# Altium PCB CANSwitch_V2.PcbDoc
Units mm, origin at the board's own origin, x right, y up, seen from the top; angles counter-clockwise.
Board outline 60 x 35 mm, 2 copper layers (Top Layer, Bottom Layer); 63 components, 44 nets, 208 pads, 92 vias.
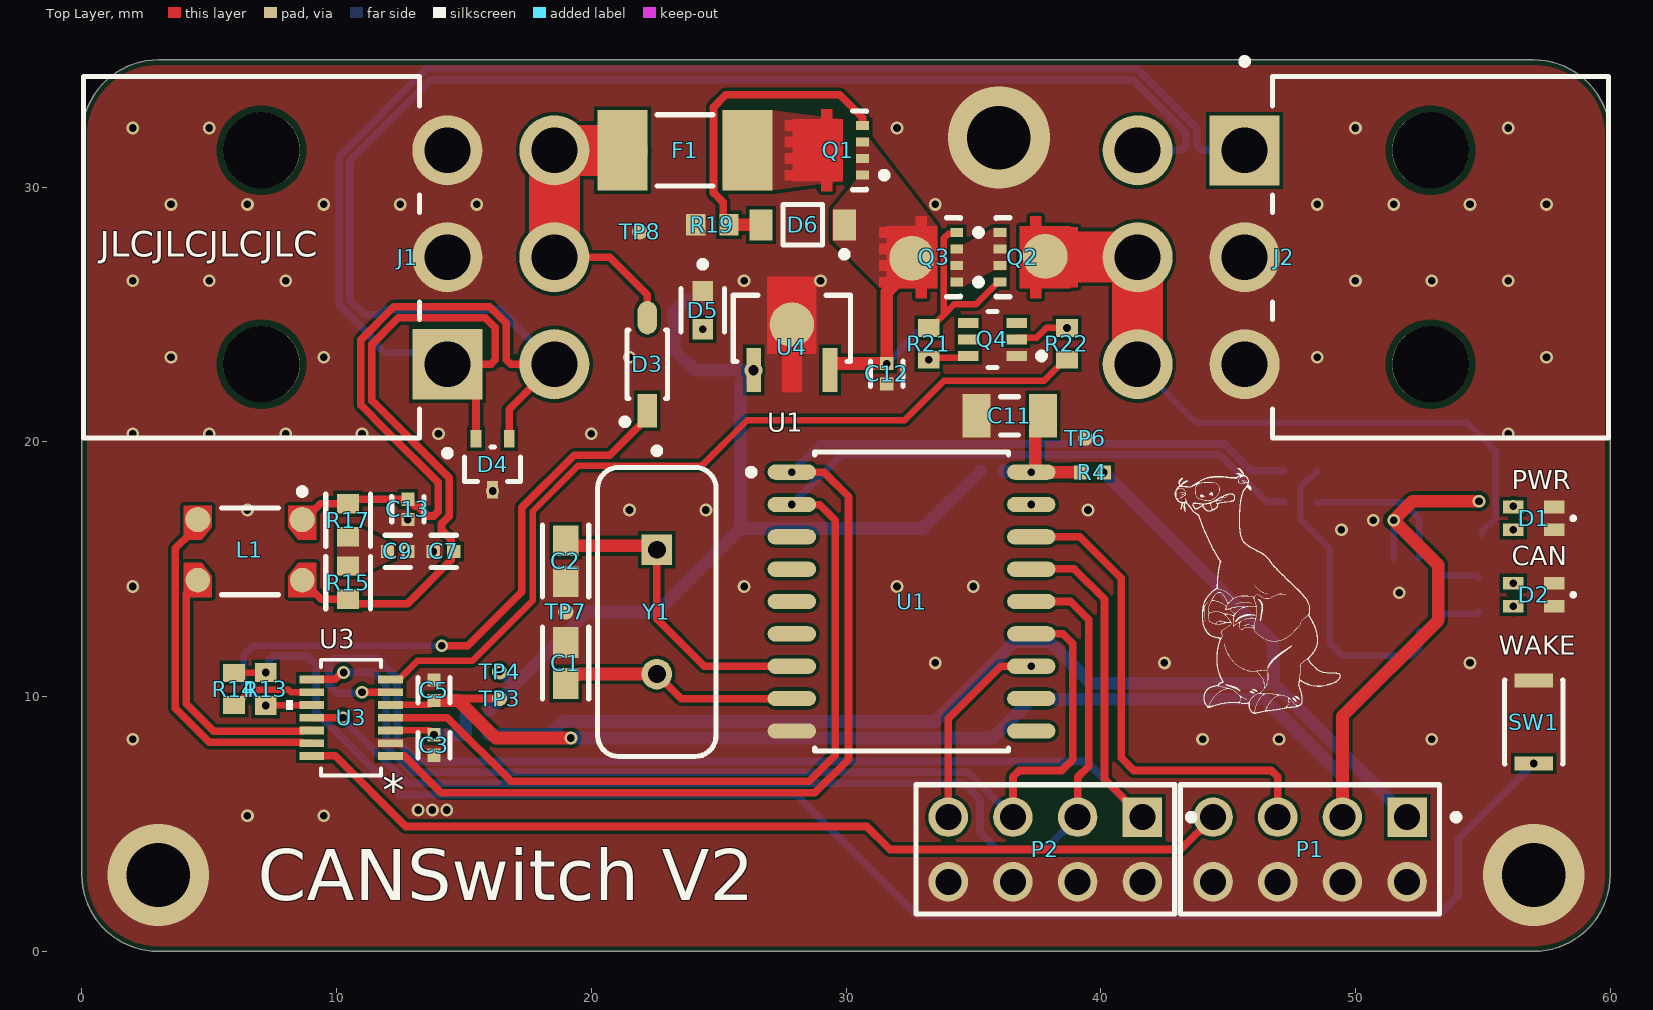
[diagram p0: Top Layer view]
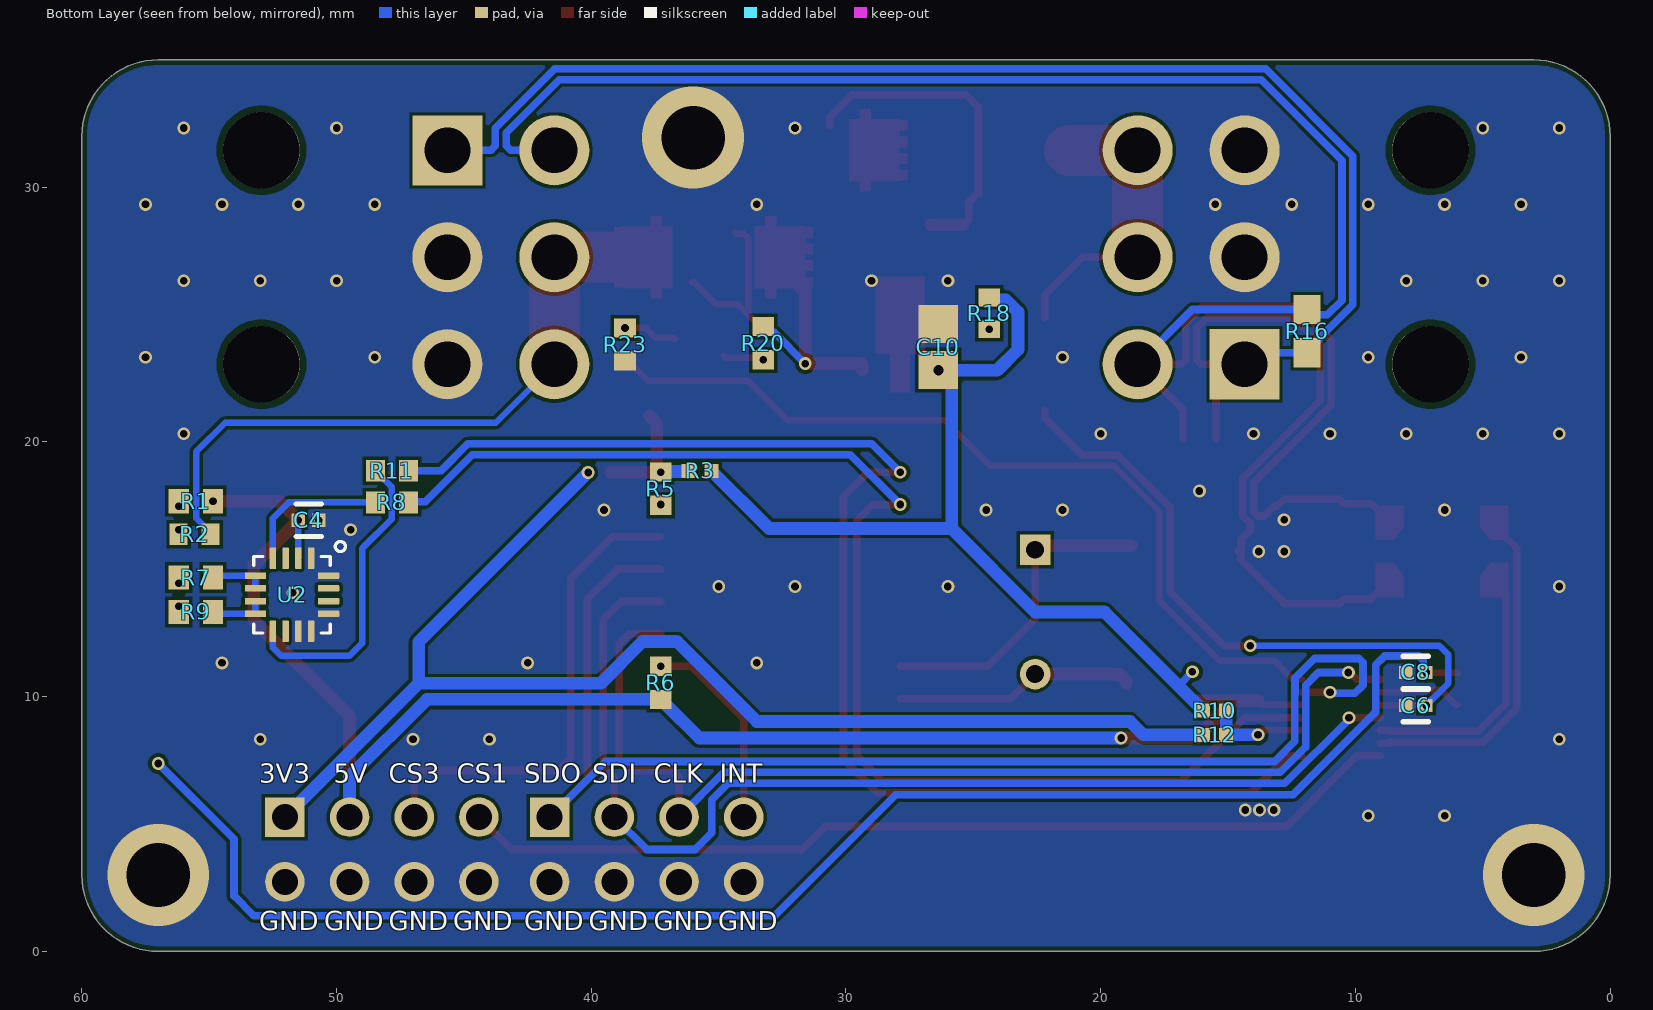
[diagram p1: Bottom Layer view, seen from below]
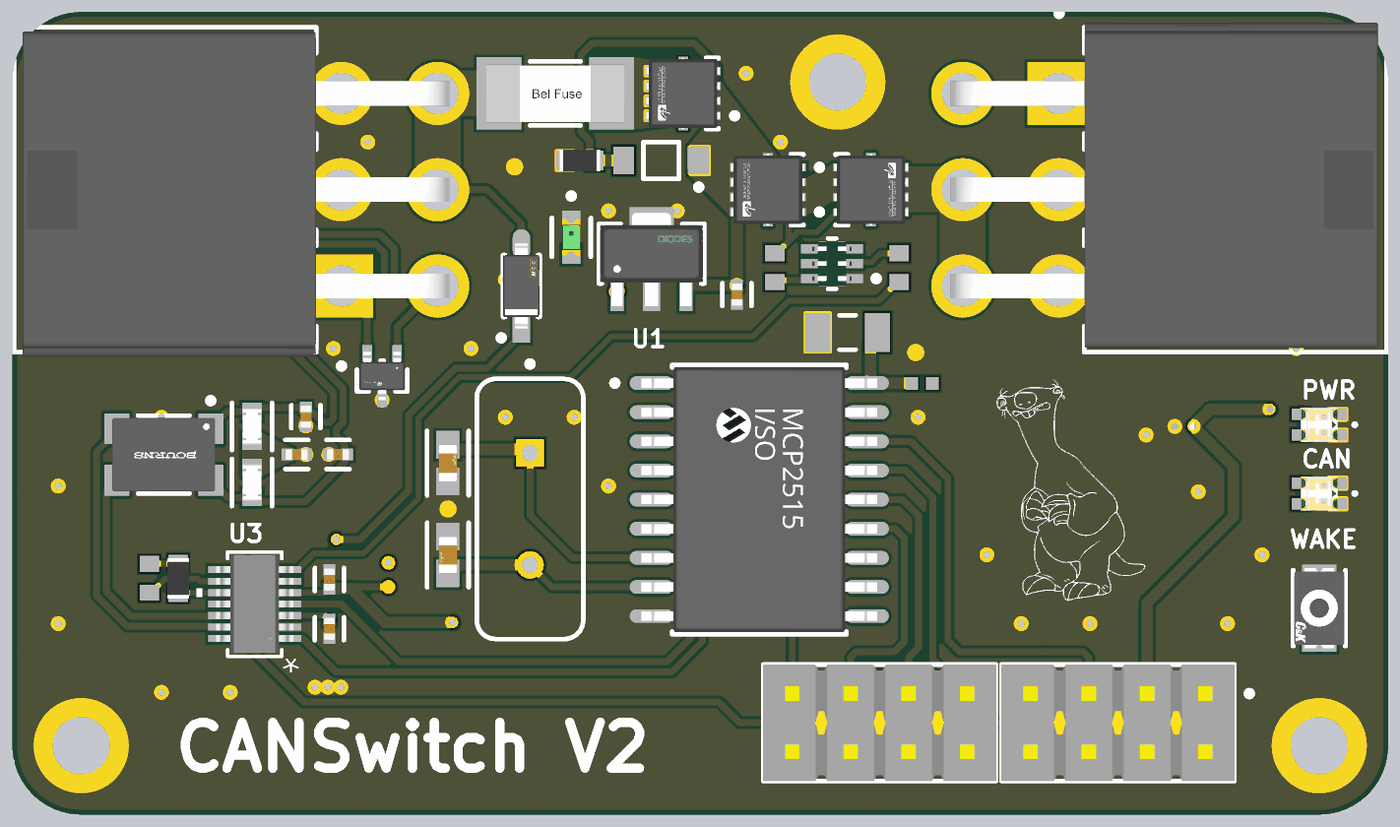
[diagram p2: 3D render of the assembled board from above, using the file's embedded part models]
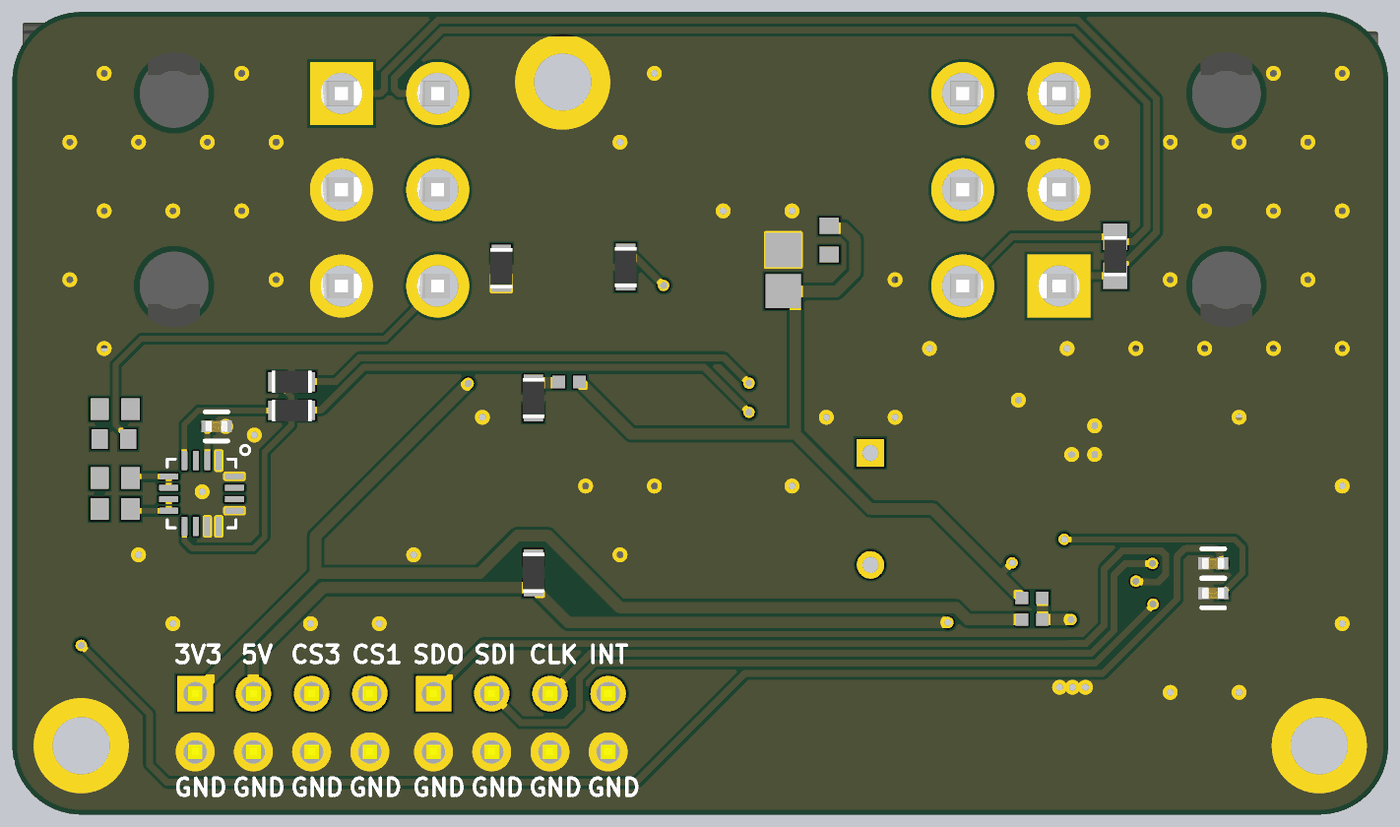
[diagram p3: 3D render of the assembled board from below, using the file's embedded part models]

## Layer stack, top to bottom
Top Solder: solder mask 0.0102, Solder Resist, Dk 3.5
Top Layer: signal copper 0.0356
Dielectric 1: dielectric 0.32, FR-4, Dk 4.8
Bottom Layer: signal copper 0.0356
Bottom Solder: solder mask 0.0102, Solder Resist, Dk 3.5

## Board outline
0,3 ccw(c3,3) 3,0 57,0 ccw(c57,3) 60,3 60,32 ccw(c57,32) 57,35 3,35 ccw(c3,32) 0,32

## Design rules (kind name [scope] priority, off if disabled: settings)
BoardOutlineClearance [All] p1: gap=0.2 ignorepadtopadclearanceinfootprint=FALSE
Clearance [All] p1: gap=0.127 ignorepadtopadclearanceinfootprint=FALSE except(0.25: Arc-Hole Track-Hole SMDPad-Hole THPad-Hole Via-Hole Fill-Hole Poly-Hole Region-Hole Text-Hole)
ComponentClearance [All] p1: gap=0.127 collisioncheckmode=3 verticalgap=0.127 showdistances=TRUE
DiffPairsRouting [All] p1: maxlimit=0.254 minlimit=0.127 mostfreqgap=0.127 toplayer_minwidth=0.127 toplayer_maxwidth=25.4 toplayer_prefwidth=0.127 bottomlayer_minwidth=0.127 bottomlayer_maxwidth=25.4 bottomlayer_prefwidth=0.127 maxuncoupledlength=12.7
Height [All] p1: minheight=0 maxheight=1816.048 prefheight=12.7
HoleSize [All] p1: absolutevalues=TRUE maxlimit=6.3 minlimit=0.3 maxpercent=80.000 minpercent=20.000
HoleToHoleClearance [All] p1: gap=0.25 allowstackedmicrovias=FALSE
MinimumAnnularRing [All] p1: minimumring=0.076
MinimumSolderMaskSliver [All] p1: minsoldermaskwidth=0
PlaneClearance [All] p1: clearance=0.127
PlaneConnect PlaneConnectPowerPads [InPadClass('PowerPads')] p1: planeconnectstyle=Direct reliefexpansion=0.508 reliefentries=4 reliefconductorwidth=0.254 reliefairgap=0.254
PlaneConnect [All] p2: pad.planeconnectstyle=Relief pad.reliefexpansion=0.3 pad.reliefentries=4 pad.reliefconductorwidth=0.127 pad.reliefairgap=0.127 via.planeconnectstyle=Direct via.reliefexpansion=0.3 via.reliefentries=4 via.reliefconductorwidth=0.127 via.reliefairgap=0.127
PolygonConnect PolygonConnectPowerPads [All vs (InPadClass('PowerPads'))] p1: connectstyle=Direct reliefconductorwidth=0.254 reliefentries=4 polygonreliefangle="90 Angle" airgapwidth=0.254
PolygonConnect [All] p2: connectstyle=Direct reliefconductorwidth=0.127 reliefentries=4 polygonreliefangle="90 Angle" airgapwidth=0.127
RoutingVias [All] p1: holewidth=0.3 width=0.6 viastyle="Through Hole" minholewidth=0.3 minwidth=0.6 maxholewidth=0.6 maxwidth=6.6
SilkToSilkClearance [All] p1: silktosilkclearance=0
SilkToSolderMaskClearance [IsPad] p1: minsilkscreentomaskgap=0.127 clearancetoexposedcopper=TRUE
SolderMaskExpansion [All] p1: expansion=0.075 istentingtop=FALSE
Width [All] p1: maxlimit=25.4 minlimit=0.127 preferedwidth=0.127 minimp=50.000000 maximp=50.000000 favimp=50.000000
20 further rules are at their usual default settings.

## Classes and differential pairs
net class 120DIFF: CAN_N CAN_P PRE_CAN_N PRE_CAN_P
component class PWR_MGMT: C10 C12 D6 F1 Q1 Q2 Q3 Q4 R19 R20 R21 R22 R23 U4
component class CANSwitch_V2: D1 J1 J2 P1 P2 R1 R2 TP3 TP4 TP6 TP7 TP8
component class CAN_0: C1 C2 C3 C4 C5 C6 C7 C8 C9 C11 C13 D2 D3 D4 D5 L1 R3 R4 R5 R6 R7 R8 R9 R10 R11 R12 R13 R14 R15 R16 R17 R18 SW1 U1 U2 U3 Y1
differential pair PRE_CAN: +PRE_CAN_P -PRE_CAN_N
differential pair CAN: +CAN_P -CAN_N

## Components (designator, comment, footprint, x,y, rotation, side; value= is the part's Value field where it differs from the comment)
C1 "GRM188R60J106ME47D" FP-GRM188-0_1-e0_2_0_55-IPC_A 18.994,11.319 r270 top
C2 "GRM188R60J106ME47D" FP-GRM188-0_1-e0_2_0_55-IPC_A 18.994,15.323 r90 top
C3 "C0402C104K8PACTU" FP-C0402-BB-MFG 13.825,8.1 r90 top value="0.10 μF"
C4 "C0402C104K8PACTU" FP-C0402-BB-MFG 51.1,16.925 r0 bottom value="0.10 μF"
C5 "C0402C104K8PACTU" FP-C0402-BB-MFG 13.825,10.25 r270 top value="0.10 μF"
C6 "C0402C104K8PACTU" FP-C0402-BB-MFG 7.625,9.65 r180 bottom value="0.10 μF"
C7 "C0402C104K8PACTU" FP-C0402-BB-MFG 14.2,15.7 r180 top value="0.10 μF"
C8 "C0402C104K8PACTU" FP-C0402-BB-MFG 7.625,10.95 r180 bottom value="0.10 μF"
C9 "C0402C104K8PACTU" FP-C0402-BB-MFG 12.4,15.7 r0 top value="0.10 μF"
C10 "C0805C225K9PACTU" CAPC2013X145X50ML20T25 26.375,23.725 r270 bottom
C11 "1206GC102KAT1A" AVX-1206-2_L 36.425,21.025 r0 top
C12 "C0402C104K8PACTU" FP-C0402-BB-MFG 31.6,22.675 r90 top value="0.10 μF"
C13 "C0402C104K8PACTU" FP-C0402-BB-MFG 12.8,17.35 r90 top value="0.10 μF"
D1 "150066RG54050" WL-SBCD_0606 57,17 r270 top
D2 "150066RG54050" WL-SBCD_0606 57,14 r270 top
D3 "1N4148W-TP" FP-SOD-123-IPC_A 22.2,23.05 r90 top
D4 "ESDCAN02-2BWY" FP-SOT323-3L-MFG 16.125,19.125 r270 top value=3pF
D5 "LTST-C190GKT" FP-LTST-C190GKT-MFG 24.375,25.175 r270 top
D6 "MMSZ5242BT1G" ONSC-SOD-123-2-425-04_V 28.3,28.525 r180 top
F1 "0679L9150-01" FP-0679L-MFG 23.68,31.45 r0 top value=0.0038Ω
J1 "455580003" FP-455580003-MFG 6.85,27.25 r90 top
J2 "455580003" FP-455580003-MFG 53.15,27.25 r270 top
L1 "SRF4532-510Y" FP-SRF4532-MFG 6.6,15.7 r180 top
P1 "TSW-104-08-L-D" SMTC-TSW-104-08-L-D_V 48.22,4 r180 top
P2 "TSW-104-08-L-D" SMTC-TSW-104-08-L-D_V 37.825,4 r180 top
Q1 "SISH615ADN-T1-GE3" SISH615ADN-T1-GE3-Footprint-1#1 29.25,31.413 r90 top
Q2 "SISH615ADN-T1-GE3" SISH615ADN-T1-GE3-Footprint-1#2 37.45,27.288 r270 top
Q3 "SISH615ADN-T1-GE3" SISH615ADN-T1-GE3-Footprint-1#2 32.95,27.213 r90 top
Q4 "SSM6N7002KFU,LF" FP-SSOP6-P-0_65A-MFG 35.75,24.025 r180 top
R1 "ERJ3EKF56R0V" RESC1608X55X30NL15T15 55.525,17.675 r180 bottom
R2 "ERJ-3EKF1001V" RESC1608X55X30LL15T15 55.575,16.375 r0 bottom
R3 "0402 JUMPER 0 OHM" RESC1005X40X25NL05T05 35.725,18.86 r0 bottom
R4 "0402 JUMPER 0 OHM" RESC1005X40X25NL05T05 39.675,18.8 r180 top
R5 "ERJ3EKF1002V" RESC1609X55X30LL15T15 37.275,18.164 r270 bottom
R6 "ERJ3EKF1002V" RESC1609X55X30LL15T15 37.275,10.544 r90 bottom
R7 "ERJ3EKF56R0V" RESC1608X55X30NL15T15 55.525,14.675 r180 bottom
R8 "ERJ3EKF1002V" RESC1609X55X30LL15T15 47.825,17.625 r0 bottom
R9 "ERJ3EKF56R0V" RESC1608X55X30NL15T15 55.525,13.325 r180 bottom
R10 "0402 JUMPER 0 OHM" RESC1005X40X25NL05T05 15.525,9.45 r180 bottom
R11 "ERJ3EKF1002V" RESC1609X55X30LL15T15 47.825,18.875 r180 bottom
R12 "0402 JUMPER 0 OHM" RESC1005X40X25NL05T05 15.525,8.5 r180 bottom
R13 "ERJ3EKF1002V" RESC1609X55X30LL15T15 7.225,10.3 r90 top
R14 "ERJ-3EKF1001V" RESC1608X55X30LL15T15 5.975,10.3 r90 top
R15 "ERJ-3EKF60R4V" FP-ERJ3EK-IPC_C 10.45,14.476 r90 top
R16 "ERJ-3EKF1200V" RESC1609X55X30ML15T15 11.9,24.35 r90 bottom
R17 "ERJ-3EKF60R4V" FP-ERJ3EK-IPC_C 10.45,16.925 r90 top
R18 "ERJ-3EKF1001V" RESC1608X55X30LL15T15 24.375,25.05 r90 bottom
R19 "ERJ3EKF1002V" RESC1609X55X30LL15T15 24.75,28.525 r180 top
R20 "ERJ3EKF1002V" RESC1609X55X30LL15T15 33.25,23.875 r90 bottom
R21 "ERJ-3EKF1001V" RESC1608X55X30LL15T15 33.25,23.85 r270 top
R22 "ERJ-3EKF1001V" RESC1608X55X30LL15T15 38.675,23.85 r270 top
R23 "ERJ3EKF1002V" RESC1609X55X30LL15T15 38.675,23.825 r270 bottom
SW1 "KXT331LHS" FP-KXT331LHS-MFG 57,9 r270 top
TP3 "TPAD6R" TP06R 16.4,9.925 r90 top
TP4 "TPAD6R" TP06R 16.4,10.975 r90 top
TP6 "TPAD6R" TP06R 39.4,20.15 r90 top
TP7 "TPAD6R" TP06R 19,13.325 r90 top
TP8 "TPAD6R" TP06R 21.9,28.25 r90 top
U1 "MCP2515-I/SO" FP-C04-051-MFG 32.575,13.734 r0 top
U2 "LM2902Q4T" LM2902Q4T-Footprint-1 51.75,14 r270 bottom
U3 "TCAN1146DYYRQ1" TCAN1146DYYRQ1-Footprint-1 10.568,9.175 r180 top
U4 "AP7381-50Y-13" FP-SOT89-MFG 27.875,24.46 r0 top
Y1 "FOXSLF/160-20" FOX-FOXSLF160-20 22.575,13.325 r270 top

## Footprints (in the part's own frame and the unit in brackets; to place one, negate y for a bottom-side part, rotate by r counter-clockwise, add the part's x,y. Pads: shape width x height; smd on the part's side, far side on the other; paste and mask are expansions set on the pad)
AVX-1206-2_L [mm] "SMD, 2-Leads, Body 3.4x1.8mm, IPC High Density"
  rect 1.1x1.7 smd: 1(-1.3,0) 2(1.3,0)
  silkscreen extent -0.35,-0.75 0.35,0.75, body extent -1.7,-0.9 1.7,0.9, height 1.52
CAPC2013X145X50ML20T25 [mm] "Chip Capacitor, 2-Leads, Body 2.00x1.25mm, IPC Low Density"
  rect 1.5x1.55 smd: 1(-0.9,0) 2(0.9,0)
  body extent -1.1,-0.72 1.1,0.72, height 1.45
FOX-FOXSLF160-20 [mm] "THD, 2-Leads, Body 11.35x4.65mm"
  rect 1.2x1.2 hole 0.7: 1(-2.44,0)
  round 1.2 hole 0.7: 2(2.44,0)
  silkscreen extent -6.45,-2.32 5.68,2.32, body extent -5.67,-2.32 5.68,2.33, height 3.6
FP-0679L-MFG [mm]
  rect 1.96x3.15 smd paste+0 mask+0: 1(-2.455,0) 2(2.455,0)
  silkscreen extent -1.1,-1.4 1.1,1.4, body extent -3.53,-1.68 3.53,1.68, height 0.25
FP-455580003-MFG [mm]
  rect 2.75x2.75 hole 1.8 paste-2539.97 mask+0: 1(-4.2,-7.5)
  round 2.75 hole 1.8 paste-2539.97 mask+0: 2(0,-7.5) 3(4.2,-7.5) 4(-4.2,-11.7) 5(0,-11.7) 6(4.2,-11.7)
  round 3 hole 3 unplated paste-2539.97 mask+0: ""(-4.2,-0.2) ""(4.2,-0.2)
  silkscreen extent -7.81,-7.63 7.09,6.78, body extent -7.19,-13.18 7.19,6.88, height 0.25
FP-C04-051-MFG [mm]
  rrect100% 1.9x0.6 smd paste+0 mask+0: 1(-4.7,5.08) 2(-4.7,3.81) 3(-4.7,2.54) 4(-4.7,1.27) 5(-4.7,0) 6(-4.7,-1.27) 7(-4.7,-2.54) 8(-4.7,-3.81) 9(-4.7,-5.08) 10(4.7,-5.08) 11(4.7,-3.81) 12(4.7,-2.54) 13(4.7,-1.27) 14(4.7,0) 15(4.7,1.27) 16(4.7,2.54) 17(4.7,3.81) 18(4.7,5.08)
  silkscreen extent -6.42,-5.87 3.8,5.87, body extent -5.75,-6.12 5.75,6.12, height 0.25
FP-C0402-BB-MFG [mm]
  rect 0.52x0.52 smd paste+0 mask+0: 1(-0.4,0) 2(0.4,0)
  silkscreen extent -0.5,-0.64 0.5,0.64, body extent -0.8,-0.4 0.8,0.4, height 0.25
FP-ERJ3EK-IPC_C [mm]
  rect 0.757x0.862 smd paste+0 mask+0: 1(-0.651,0) 2(0.651,0)
  silkscreen extent -1.03,-0.87 1.03,0.87, body extent -1.13,-0.58 1.13,0.58, height 0.25
FP-GRM188-0_1-e0_2_0_55-IPC_A [mm]
  rect 1.208x1.012 smd paste+0 mask+0: 1(-0.802,0) 2(0.802,0)
  silkscreen extent -1.41,-0.91 1.41,0.91, body extent -1.91,-1.01 1.91,1.01, height 0.25
FP-KXT331LHS-MFG [mm]
  rect 0.55x1.5 smd paste+0 mask+0: 1(-1.625,0) 2(1.625,0)
  silkscreen extent -1.65,-1.15 1.65,1.15, body extent -2,-1.25 2,1.25, height 0.25
FP-LTST-C190GKT-MFG [mm]
  rect 0.8x0.8 smd paste+0 mask+0: 1(-0.75,0) 2(0.75,0)
  silkscreen extent -1.92,-0.85 0.85,0.85, body extent -1.25,-0.55 1.25,0.55, height 0.25
FP-SOD-123-IPC_A [mm]
  rect 1.308x0.762 smd paste+0 mask+0: 1(-1.825,0)
  rrect100% 1.308x0.762 smd paste+0 mask+0: 2(1.825,0)
  silkscreen extent -2.39,-0.8 1.35,1.01, body extent -2.98,-1.3 2.98,1.3, height 0.25
FP-SOT89-MFG [mm]
  rect 0.58x1.73 smd paste+0 mask+0: 1(-1.5,-1.635) 3(1.5,-1.635)
  round 1.74 smd paste+0 mask+0: 2(0,0.146)
  Top Layer region: -0.38,-2.5 0.38,-2.5 0.38,-1 0.967,-1 0.967,2.03 -0.967,2.03 -0.967,-1 -0.38,-1 -0.38,-2.5
  silkscreen extent -2.3,-1.3 2.3,1.3, body extent -2.4,-2.6 2.4,2.13, height 0.25
FP-SOT323-3L-MFG [mm]
  rect 0.7x0.42 smd paste+0 mask+0: 1(-1,0.65) 2(-1,-0.65) 3(1,0)
  silkscreen extent -0.67,-1.1 0.67,1.1, body extent -1.45,-1.2 1.45,1.2, height 0.25
FP-SRF4532-MFG [mm]
  round 0.99 smd paste+0 mask+0: 1(-2.05,-1.25) 2(2.05,-1.25)
  round 0.97 smd paste+0 mask+0: 3(2.05,1.125) 4(-2.05,1.125)
  Top Layer region: -2.6,0.45 -2.6,1.8 -1.5,1.8 -1.5,0.95 -1.9,0.45
  Top Layer region: 1.5,1.8 2.6,1.8 2.6,0.45 1.9,0.45 1.5,0.95
  Top Layer region: 1.5,-1.8 1.5,-0.95 1.9,-0.45 2.6,-0.45 2.6,-1.8
  Top Layer region: -2.6,-1.8 -2.6,-0.45 -1.9,-0.45 -1.5,-0.95 -1.5,-1.8
  silkscreen extent -2.17,-2.47 1.12,1.7, body extent -2.7,-1.9 2.7,1.9, height 0.25
FP-SSOP6-P-0_65A-MFG [mm]
  rect 0.8x0.4 smd paste+0 mask+0: 1(-0.95,0.65) 2(-0.95,0) 3(-0.95,-0.65) 4(0.95,-0.65) 5(0.95,0) 6(0.95,0.65)
  silkscreen extent -2.05,-1.1 0.18,1.1, body extent -1.45,-1.2 1.45,1.2, height 0.25
LM2902Q4T-Footprint-1 [mm]
  rrect25% 0.84x0.26 smd: 1(-1.435,0.75) 2(-1.435,0.25) 3(-1.435,-0.25) 4(-1.435,-0.75) 9(1.435,-0.75) 10(1.435,-0.25) 11(1.435,0.25) 12(1.435,0.75)
  rrect25% 0.26x0.84 smd: 5(-0.75,-1.435) 6(-0.25,-1.435) 7(0.25,-1.435) 8(0.75,-1.435) 13(0.75,1.435) 14(0.25,1.435) 15(-0.25,1.435) 16(-0.75,1.435)
  silkscreen extent -2.09,-1.5 1.5,2.1
ONSC-SOD-123-2-425-04_V [mm] "SOD, 2-Leads, Body 2.69x1.6mm"
  rect 0.91x1.22 smd: 1(-1.635,0) 2(1.635,0)
  silkscreen extent -1.76,-0.8 0.78,1.28, body extent -1.35,-0.8 1.35,0.8, height 1.35
RESC1005X40X25NL05T05 [mm] "Chip Resistor, 2-Leads, Body 1.00x0.50mm, IPC Medium Density"
  rect 0.55x0.55 smd: 1(-0.45,0) 2(0.45,0)
  body extent -0.53,-0.27 0.53,0.28, height 0.4
RESC1608X55X30LL15T15 [mm] "Chip Resistor, 2-Leads, Body 1.60x0.80mm, IPC High Density"
  rect 0.7x0.85 smd: 1(-0.625,0) 2(0.625,0)
  body extent -0.87,-0.48 0.87,0.48, height 0.55
RESC1608X55X30NL15T15 [mm] "Chip Resistor, 2-Leads, Body 1.60x0.80mm, IPC Medium Density"
  rect 0.8x0.95 smd: 1(-0.675,0) 2(0.675,0)
  body extent -0.87,-0.48 0.87,0.48, height 0.55
RESC1609X55X30LL15T15 [mm] "Chip Resistor, 2-Leads, Body 1.75x0.95mm, IPC High Density"
  rect 0.75x0.85 smd: 1(-0.65,0) 2(0.65,0)
  body extent -0.87,-0.48 0.87,0.48, height 0.55
RESC1609X55X30ML15T15 [mm] "Chip Resistor, 2-Leads, Body 1.75x0.95mm, IPC Low Density"
  rect 1.15x1.05 smd: 1(-0.85,0) 2(0.85,0)
  body extent -0.87,-0.48 0.87,0.48, height 0.55
SISH615ADN-T1-GE3-Footprint-1#1 [mm]
  rect 0.35x0.5 smd paste+0 mask+0: 1(-0.937,-1.4) 2(-0.288,-1.4) 3(0.363,-1.4) 4(1.012,-1.4)
  round 0.025 smd: 5-6-7-8(0.038,0.51)
  Top Layer region: -1.187,-0.63 -1.187,-0.215 -1.568,-0.215 -1.568,0.215 -1.187,0.215 -1.187,1.35 -1.137,1.35 -1.137,1.65 -0.737,1.65 -0.737,1.35 -0.487,1.35 -0.487,1.65 -0.088,1.65 -0.088,1.35 0.163,1.35 0.163,1.65 0.563,1.65 0.563,1.35 0.813,1.35 0.813,1.65 1.212,1.65 1.212,1.35 1.262,1.35 1.262,0.215 1.643,0.215 1.643,-0.215 1.262,-0.215 1.262,-0.63
  silkscreen extent -1.51,-2.38 1.59,-1.01, body extent -1.67,-1.75 1.74,1.75, height 0.25
SISH615ADN-T1-GE3-Footprint-1#2 [mm]
  rect 0.35x0.5 smd paste+0 mask+0: 1(-0.937,-1.4) 2(-0.288,-1.4) 3(0.363,-1.4) 4(1.012,-1.4)
  round 1.769 smd paste+0 mask+0: 5-6-7-8(0,0.367)
  Top Layer region: -1.187,-0.63 -1.187,-0.215 -1.568,-0.215 -1.568,0.215 -1.187,0.215 -1.187,1.35 -1.137,1.35 -1.137,1.65 -0.737,1.65 -0.737,1.35 -0.487,1.35 -0.487,1.65 -0.088,1.65 -0.088,1.35 0.163,1.35 0.163,1.65 0.563,1.65 0.563,1.35 0.813,1.35 0.813,1.65 1.212,1.65 1.212,1.35 1.262,1.35 1.262,0.215 1.643,0.215 1.643,-0.215 1.262,-0.215 1.262,-0.63
  silkscreen extent -1.51,-2.37 1.59,-1.01, body extent -1.67,-1.75 1.74,1.75, height 0.25
SMTC-TSW-104-08-L-D_V [mm] "CONN, 8-Leads, Body 10.16x5.08mm, Pitch 2.54mm"
  rect 1.55x1.55 hole 1.02: 1(-3.81,-1.27)
  round 1.55 hole 1.02: 2(-3.81,1.27) 3(-1.27,-1.27) 4(-1.27,1.27) 5(1.27,-1.27) 6(1.27,1.27) 7(3.81,-1.27) 8(3.81,1.27)
  silkscreen extent -5.86,-2.54 5.08,2.54, body extent -5.08,-2.54 5.08,2.54, height 8.38
TCAN1146DYYRQ1-Footprint-1 [mil]
  rect 38.5x12 smd paste+0 mask+0: 1(-60.75,59.07) 2(-60.75,39.38) 3(-60.75,19.69) 4(-60.75,0) 5(-60.75,-19.69) 6(-60.75,-39.38) 7(-60.75,-59.07) 8(60.75,-59.07) 9(60.75,-39.38) 10(60.75,-19.69) 11(60.75,0) 12(60.75,19.69) 13(60.75,39.38) 14(60.75,59.07)
  silkscreen extent -47,-90 100,90, body extent -66,-84 66,84, height 43
TP06R [mm] "Testpoint, round, d=0.6mm"
  round 0.6 smd paste-1: 1(0,0)
WL-SBCD_0606 [mm] "SMT Bi-color Chip LED Diffuesed, body 1.5x1.6mm"
  rect 0.5x0.8 smd: 1(-0.45,0.8) 2(-0.45,-0.8) 3(0.45,-0.8) 4(0.45,0.8)
  silkscreen extent -0.07,1.48 0.07,1.63, body extent -0.75,-0.8 0.75,0.8, height 0.55

## Part data
C1 C2: library part CMP-2006-02792-2, "Chip Multilayer Ceramic Capacitors for General Purpose, 0603, 10uF, X5R, 15%, 20%, 6.3V", Capacitance=10uF, Case Code (Imperial)=0603, Case Code (Metric)=1608, Dielectric=X5R, Max Operating Temperature=85°C, Min Operating Temperature=-55°C, Package Quantity=4000, Tolerance=20%, Voltage=6.3V, Case/Package=0603, Depth=0.8mm, Height=0.8mm, Lead Free="Lead Free", Length=1.6mm, Material=Ceramic, Mount="Surface Mount", Packaging="Tape and Reel", Radiation Hardening=No, REACH SVHC="No SVHC", Termination=SMD/SMT, Thickness=0.035inch, Voltage Rating=6.3V, Voltage Rating (DC)=6.3V, Width=0.031inch
C3 C4 C5 C6 C7 C8 C9 C12 C13: library part CMP-2008-02046-2, "CAP CER 0.1UF 10V X5R 0402", Capacitance="0.10 μF", Manufacturer=Kemet, Package=C0402-BB, Temperature="-55°C to +125°C", Temperature Characteristic=X5R, Temperature Coefficient=15%, Temperature Range High=+125°C, Temperature Range Low=-55°C, Tolerance=0.1, Voltage Rating="10 V", Automotive=No, Category=Cap, ComponentLink2Description=Datasheet, ComponentLink2URL=https://content.kemet.com/datasheets/KEM_C1002_X7R_SMD.pdf, Device Class L1="Passive Components", Device Class L2=Capacitors, Device Class L3="Ceramic Capacitors", Digikey Description="CAP CER 0.1UF 10V X5R 0402", Height=0.55mm, Ipc Land Pattern Name=CAPC10050X50, Lead Free=Yes, Manufacturer Part Number=C0402C104K8PACTU, Material=Ceramic, Mouser Description="Capacitor 100 nF 10 VDC 0402", Octopart=https://octopart.com/c0402c104k8pactu-kemet-140039, RoHS=TRUE
C10: library part CMP-1036-04819-2, Manufacturer=Kemet, Part Number=C0805C225K9PACTU
C11: library part CMP-2000-05468-1, "Chip Capacitor, 1 nF, +/- 10%, -55 to 125 degC, 1206 (3216 Metric), RoHS, Tape and Reel", Capacitance=0.001uF, Case Size/Dimension=1206, Dielectric=X7R, Manufacturer=AVX, Package Description="2-Pin SMD, Body 3.4 x 1.8 mm", Rated Voltage=2000V, Tolerance=10%, Tolerance (%)=±10%, Datasheet URL=https://datasheet.ciiva.com/11787/0900766b80ed4c37-11787781.pdf, Datasheet Version=11/2010, Manufacturer URL=http://www.avx.com/, Mounting Technology=SurfaceMount, Package Reference=1206, PartNumber=1206GC102KAT1A, Voltage Rating DC=2000V
D1 D2: library part CMP-004-00034-2, "Led, Red/Grn, 180Mcd/230Mcd, 624Nm/525Nm Rohs Compliant: Yes"
D3: library part CMP-2000-04993-2, "DIODE GEN PURP 100V 150MA SOD123", Average Rectified Current=150mA, Capacitance=4pF, Forward Voltage=1V, Max Forward Surge Current (Ifsm)=1A, Max Operating Temperature=150°C, Max Repetitive Reverse Voltage (Vrrm)=100V, Max Reverse Leakage Current=5uA, Max Surge Current=2A, Min Operating Temperature=-65°C, Package Quantity=3000, Power Dissipation=400mW, Current Rating=150mA, Element Configuration=Single, Forward Current=150mA, Height=1.2mm, Lead Free="Lead Free", Length=2.85mm, Max Reverse Voltage (DC)=100V, Mount="Surface Mount", Number of Pins=2, Output Current=150mA, Packaging="Tape and Reel", Peak Non-Repetitive Surge Current=2A, Polarity=Standard, Radiation Hardening=No, Recovery Time=4ns, Reverse Recovery Time=4ns, Voltage Rating (DC)=100V, Width=1.8mm
D4: library part CMP-12225-000055-1, "TVS DIODE 26.5V 44V SOT323-3", Breakdown Voltage=28.5V, Capacitance=3pF, Clamping Voltage=44V, Manufacturer=STMicroelectronics, Max Junction Temp=+175°C, Package=SOT323-3L, Peak Pulse Current=3A, Peak Pulse Power=170W, Reverse Standoff Voltage=26.5V, Temperature="-55°C to +175°C", Temperature Range Low=-55°C, Automotive=Yes, Automotive Grade="Grade 0", Category=Diode, ComponentLink2Description=Datasheet, ComponentLink2URL=https://www.st.com/resource/en/datasheet/esdcan02-2bwy.pdf, Device Class L1="Circuit Protection", Device Class L2="TVS Diodes", Device Class L3=unset, Digikey Description="TVS DIODE 26.5V 44V SOT323-3", Direction=Bidirectional, Height=1.1mm, Ipc Land Pattern Name=SOT65P210X95-3, Lead Free=Yes, Manufacturer Part Number=ESDCAN02-2BWY, Mouser Description="TVS Diodes / ESD Suppressors Automotive dual-line Transil, Transient voltage suppressor (TVS) for CAN bus", Number of Channels=2, Octopart=https://octopart.com/esdcan02-2bwy-stmicroelectronics-58631133, RoHS=TRUE, Standoff Height=0mm, Temperature Range High=+175°C
D5: library part CMP-22017-000005-2, "LED GREEN CLEAR CHIP SMD", Case Code (Imperial)=0603, Case Code (Metric)=1608, Color=Green, Forward Current=30mA, Forward Voltage=2.1V, Lens Color=Colorless, Max Operating Temperature=85°C, Min Operating Temperature=-55°C, Package Quantity=1, Power Dissipation=100mW, Reverse Voltage=5V, Test Current=10mA, Voltage=2V, Case/Package=0603, Depth=0.8mm, Dominant Wavelength=569nm, Height=0.8mm, Illumination Color=Green, Lead Free="Lead Free", Length=1.6mm, Lens Style=Clear, Lens Transparency=Clear, Luminous Intensity=6mcd, Mount="Surface Mount", Number of Elements=1, Number of LEDs=1, Number of Pins=2, Packaging="Tape and Reel", Power Rating=100mW, Radiation Hardening=No, Viewing Angle=130°, Wavelength=565nm, Width=0.8mm
D6: library part CMP-1060-00565-1, "Zener Voltage Regulator, 500 mW, 2-Pin SOD-123, Pb-Free, Tape and Reel", Manufacturer="On Semiconductor", ComponentLink1Description="Manufacturer URL", ComponentLink1URL=http://www.onsemi.com/, ComponentLink2Description=Datasheet, ComponentLink2URL=http://www.onsemi.com/pub_link/Collateral/MMSZ5221BT1-D.PDF, ComponentLink3Description="Package Specification", ComponentLink3URL=http://www.onsemi.com/pub_link/Collateral/425-04.PDF, DatasheetVersion="Rev. 12", Mounting Technology="Surface Mount", P Max (W)=0.5, PackageDescription="2-Pin SOD, Body 1.6 x 2.69 mm", PackageReference=SOD-123-2-425-04, PackageVersion="Rev. G, 10/2009", Packing="Tape and Reel", PartNumber=MMSZ5242BT1G, RoHS=Pb-Free, VZ Typ (V)=12
F1: library part CMP-16042-000002-1, "FUSE BRD MNT 15A 125VAC/VDC", Fuse Current=15A, Fuse Interrupt Ac Current=50A, Fuse Interrupt Dc Current=300A, Fuse Voltage Drop=0.13V, Manufacturer="Bel Fuse", Max Fuse Ac Voltage=125V, Package=0679L, Resistance=0.0038Ω, Temperature="-55°C to +125°C", Temperature Range High=+125°C, Temperature Range Low=-55°C, Automotive=Yes, Automotive Grade="Grade 1", Category=Fuse, ComponentLink2Description=Datasheet, ComponentLink2URL=https://www.belfuse.com/resources/CircuitProtection/datasheets/0679L%20Sep2016.pdf, Device Class L1="Circuit Protection", Device Class L2=Fuses, Device Class L3=unset, Digikey Description="FUSE BRD MNT 15A 125VAC/VDC", Fuse Blow Speed=Fast, Fuse I2T=103.5A2Sec, Height=2.79mm, Ipc Land Pattern Name=CAPC610254X254, Lead Free=Yes, Manufacturer Part Number=0679L9150-01, Max Fuse Dc Voltage=125V, Octopart=https://octopart.com/0679l9150-01-bel+fuse-70850665, RoHS=TRUE, Voltage Rating=125V
J1 J2: library part CMP-04776-000024-1, "CONN HEADER R/A 6POS 4.2MM", Current Rating=8A, Manufacturer=Molex, Package=0, Temperature="-40°C to +105°C", Temperature Range High=+105°C, Temperature Range Low=-40°C, Voltage Rating=600V, Automotive=No, Category=Conn, ComponentLink2Description=Datasheet, ComponentLink2URL=https://www.molex.com/webdocs/datasheets/pdf/en-us/0455580003_PCB_HEADERS.pdf, Conn Gender=Male, Conn Orientation="Right Angle", Contact Material=Tin,Nickel, Device Class L1=Connectors, Device Class L2="Headers and Wire Housings", Device Class L3=unset, Digikey Description="CONN HEADER R/A 6POS 4.2MM", Footprint Url=https://www.molex.com/pdm_docs/sd/455580003_sd.pdf, Height=10.38mm, Lead Free=Yes, Manufacturer Part Number=455580003, Mouser Description="Conn Power HDR 6 POS 4.2mm Solder ST Thru-Hole 6 Terminal 1 Port Mini-Fit Jr™ Tray", Number Of Contacts=6, Number Of Rows=2, Octopart=https://octopart.com/45558-0003-molex-7672845, Pitch=4.2mm, RoHS=TRUE, Standoff Height=0.4mm
L1: library part CMP-07251-000006-1, "CMC 51UH 200MA 2LN 2KOHM SMD", Case/Package=4532, Current=200mA, DC Resistance (DCR)=3.5R, Inductance=51uH, Insulation Resistance=10MR, Max Operating Temperature=125°C, Min Operating Temperature=-40°C, Package Quantity=1, Resistance=2kR, Self Resonant Frequency=100kHz, Tolerance=50%, Voltage Rating (DC)=50V, Contact Plating=Tin, Core Material=Ferrite, Current Rating=200mA, DC Current=200mA, Depth=3.4mm, Element Configuration=Dual, Height=0.118inch, Impedance=2kR, Lead Free="Lead Free", Length=4.5mm, Material=Steel, Max DC Current=200mA, Mount="Surface Mount", Number of Lines=2, Packaging="Tape and Reel", REACH SVHC="No SVHC", RoHS Compliant=Yes, Series=SRF4532, Termination=SMD/SMT, Test Frequency=100kHz, Width=0.126inch
P1 P2: library part CMP-1681-00006-4, "Male Header, Pitch 2.54 mm, 2 x 4 Position, Height 8.38 mm, Tail Length 5.08 mm, -55 to 125 degC, RoHS, Bulk", Colour=Black, Current Rating="7.6 A", Manufacturer=Samtec, Package Quantity=1, Voltage Rating="550 V", ComponentLink1Description="Manufacturer URL", ComponentLink1URL=http://www.samtec.com/, ComponentLink2Description=Datasheet, ComponentLink2URL=https://datasheet.ciiva.com/25616/0900766b81154476-25616879.pdf, ComponentLink3Description="Package Specification", ComponentLink3URL=http://suddendocs.samtec.com/prints/tsw-xxx-xx-x-x-xx-xxx-footprint.pdf, Contact Finish=Gold, Contact Material=Bronze, Contact Plating=Gold, DatasheetVersion=04/2012, Lead Pitch="0.1 inch", Mount="Through Hole", Mounting Technology="Through Hole", PackageDescription="Male Header, Pitch 2.54 mm, 2 x 4 Position, Height 8.38 mm, Tail Length 5.08 mm", PackageReference=TSW-104-08-L-D, Packaging=Bulk, Pins=8, REACH SVHC="No SVHC", RoHSCompliant=true, Rows=2
Q1: library part CMP-013-00036-2, "Trans MOSFET P-CH 20V 22.1A 8-Pin PowerPAK 1212 EP T/R"
Q2 Q3: library part CMP-013-00036-1, "Trans MOSFET P-CH 20V 22.1A 8-Pin PowerPAK 1212 EP T/R"
Q4: library part CMP-35916-000009-1, "MOSFET 2N-CH 60V 0.3A", Continuous Drain Current (ID)=300mA, Drain to Source Voltage (Vdss)=60V, Input Capacitance=40pF, Max Power Dissipation=285mW, FET Type="2 N-Channel", Mount="Surface Mount", Packaging="Tape and Reel", Rds On Max=1.5R
R1 R7 R9: library part CMP-2000-00572-1, Manufacturer=Panasonic, Part Number=ERJ3EKF56R0V
R2 R14 R18 R21 R22: library part CMP-2000-00180-1, Manufacturer=Panasonic, Part Number=ERJ-3EKF1001V
R3 R4 R10 R12: library part CMP-009-00206-2, "READ THE NAME"
R5 R6 R8 R11 R13 R19 R20 R23: library part CMP-1012-00623-3, "Chip Resistor, 10 KOhm, +/- 1%, 0.1 W, -55 to 155 degC, 0603 (1608 Metric), RoHS, Tape and Reel", Case Code (Imperial)=0603, Case Code (Metric)=1608, Manufacturer=Panasonic, Max Operating Temperature=155degC, Max Power Dissipation=100mW, Min Operating Temperature=-55degC, Package Description="2-Pin Surface Mount Device, Body 1.6 x 0.85 mm", Package Quantity=1, Package Reference=603, Resistance=10KOhm, Temperature Coefficient=100ppm\/degreesC, Tolerance=1%, Voltage Rating=75V, Case\/Package=0603, Composition=ThickFilm, Contact Plating=Tin, Datasheet URL=https://industrial.panasonic.com/cdbs/www-data/pdf/RDA0000/AOA0000C304.pdf, Datasheet Version=02/2017, Depth=0.8mm, Height=0.45mm, Lead Free=LeadFree, Length=1.6mm, Manufacturer URL=http://www.panasonic.com/, Military Standard=Not, Mount=SurfaceMount, Mounting Technology=SurfaceMount, Number of Pins=2, Number of Terminations=2, Packaging=TapeandReel, Power Rating=100mW, Radiation Hardening=No, REACH SVHC=NoSVHC, RoHSCompliant=true, Termination=SMD/SMT, Voltage Rating (DC)=75V, Width=0.031inch
R15 R17: library part CMP-1012-00372-3, "RES SMD 60.4 OHM 1% 1/10W 0603", Case Code (Imperial)=0603, Case Code (Metric)=1608, Max Operating Temperature=155°C, Max Power Dissipation=100mW, Min Operating Temperature=-55°C, Package Quantity=1, Resistance=60.4R, Resistance Tolerance=1%, Resistor Type="Thick Film", Temperature Coefficient=100ppm/°C, Voltage Rating=75V, Voltage Rating (DC)=50V, Case/Package=0603, Construction=Rectangular, Contact Plating=Tin, Depth=0.8mm, Features="Automotive AEC-Q200", Height=0.022inch, Lead Free="Lead Free", Length=1.6mm, Military Standard=Not, Mount="Surface Mount", Number of Terminations=2, Packaging="Tape and Reel", Power Rating=100mW, REACH SVHC="No SVHC", RoHS Compliant=Yes, Series=ERJ, Termination=SMD/SMT, Tolerance=1%, Width=0.031inch
R16: library part CMP-2000-00213-2, "Chip Resistor, 120 Ohm, +/- 1%, 0.1 W, -55 to 155 degC, 0603 (1608 Metric), RoHS, Tape and Reel", Case Code (Imperial)=0603, Case Code (Metric)=1608, Manufacturer=Panasonic, Max Operating Temperature=155degC, Max Power Dissipation=100mW, Min Operating Temperature=-55degC, Package Description="2-Pin Surface Mount Device, Body 1.6 x 0.85 mm", Package Quantity=1, Resistance=120Ohm, Temperature Coefficient=100ppm/degreesC, Tolerance=1%, Voltage Rating=75V, Case/Package=0603, Composition=ThickFilm, Contact Plating=Tin, Datasheet URL=https://industrial.panasonic.com/cdbs/www-data/pdf/RDA0000/AOA0000C283.pdf, Datasheet Version=42095.0, Depth=0.8mm, Height=0.022inch, Lead Free=LeadFree, Length=1.6mm, Manufacturer URL=http://www.panasonic.com/, Military Standard=Not, Mount=SurfaceMount, Number of Pins=2, Number of Terminations=2, Package Reference=0603, Package URL=http://www.st.com/st-web-ui/static/active/en/resource/technical/document/datasheet/CD00001320.pdf, Packaging=TapeandReel, Power Rating=100mW, Radiation Hardening=No, REACH SVHC=NoSVHC, RoHSCompliant=true, Termination=SMD/SMT, Voltage Rating (DC)=75V, Width=0.031inch
SW1: library part CMP-10040-000029-1, "SWITCH TACTILE SPST-NO 0.02A 15V", Current Rating=5A, Flammability Rating="UL94 V-0", Insulation Color=Black, Max Operating Temperature=85°C, Min Operating Temperature=-40°C, Operating Force=240gf, Actuator Type=Standard, Connector Type=USB, Contact Plating=Gold, Gender=Receptacle, Illumination Type=Non-Illuminated, Mechanical Life=500000Cycles, Mount="Surface Mount", Number Of Contacts=24, Number of Ports=1, Packaging="Tape and Reel", Switch Function=Off-Mom, Switch Travel=0.13mm, Termination=Solder, Throw Configuration=SPST
TP3 TP4 TP6 TP7 TP8: library part CMP-00028-00002-2, "0.6mm round", Pins=1
U1: library part CMP-0186-00133-3, "IC CAN CONTROLLER W/SPI 18SOIC", Ambient Temperature Range High=+125°C, Ambient Temperature Range Low=-65°C, Manufacturer=Microchip, Max Supply Voltage=5.5V, Min Supply Voltage=2.7V, Nominal Supply Current=10mA, Package=C04-051, Temperature="-40°C to +85°C", Temperature Range High=+85°C, Temperature Range Low=-40°C, Automotive=No, Category=IC, ComponentLink2Description=Datasheet, ComponentLink2URL=http://ww1.microchip.com/downloads/en/DeviceDoc/MCP2515-Stand-Alone-CAN-Controller-with-SPI-20001801J.pdf, Device Class L1="Integrated Circuits (ICs)", Device Class L2="Interface ICs", Device Class L3=Controllers, Digikey Description="IC CAN CONTROLLER W/SPI 18SOIC", Footprint Url=http://ww1.microchip.com/downloads/en/DeviceDoc/18L_SOIC_Wide_7.50_SO_C04-0051D.pdf, Function=Controller, Height=2.65mm, Interface=SPI,CAN, Ipc Land Pattern Name=SOIC127P1030X265-18, Lead Free=Yes, Manufacturer Part Number=MCP2515-I/SO, Mouser Description="CAN Interface IC W/ SPI Interface", Octopart=https://octopart.com/mcp2515-i%2Fso-microchip-430187, RoHS=TRUE, Standoff Height=0.1mm
U2: library part CMP-014-00004-1, "LM2902 Series 30 V 1.3 MHz Low-Power Quad Operational Amplifier - QFN-16 (3x3)"
U3: library part CMP-015-00012-2, "Automotive CAN FD transceiver with watchdog, bus diagnostics and partial networking via sele 14-SOT-23-THIN -40 to 150"
U4: library part CMP-12756-000009-1, "IC REG LINEAR 5V 150MA SOT89", Ambient Temperature Range High=+85°C, Ambient Temperature Range Low=-40°C, Dropout Voltage=1000mV, Manufacturer="Diodes Inc.", Max Junction Temp=+125°C, Max Supply Voltage=40V, Min Supply Voltage=3.3V, Nominal Supply Current=2.5-25uA, Output Current=150mA, Output Voltage=5V, Package=SOT89, Temperature="-40°C to +125°C", Automotive=No, Category=IC, ComponentLink2Description=Datasheet, ComponentLink2URL=https://www.diodes.com/assets/Datasheets/AP7381.pdf, Device Class L1="Integrated Circuits (ICs)", Device Class L2="Power Management ICs", Device Class L3="Voltage Regulators - Linear", Digikey Description="IC REG LINEAR 5V 150MA SOT89", Footprint Url=https://www.diodes.com/assets/Package-Files/SOT89.pdf, Height=1.6mm, Lead Free=Yes, Manufacturer Part Number=AP7381-50Y-13, Number of Outputs=1, Octopart=https://octopart.com/ap7381-50y-13-diodes+inc.-87775116, Output Type=Fixed, RoHS=TRUE, Temperature Range High=+125°C, Temperature Range Low=-40°C
Y1: library part CMP-1749-00003-1, "Resistance Weld Thru-Hole Crystal, 16 MHz, -20 to 70 degC, 2-Pin THD, RoHS, Bulk", Case\Package=Axial, Max Operating Temperature="155 degC", Min Operating Temperature="-55 degC", Package Quantity=200, Power Rating="250 mW", Resistance="221 kohm", Tolerance=1%, Voltage Rating="250 V", ComponentLink1Description="Manufacturer URL", ComponentLink1URL=http://www.foxonline.com/, ComponentLink2Description=Datasheet, ComponentLink2URL=http://www.foxonline.com/pdfs/hc49slf.pdf, DatasheetVersion=Mar-15, Length="0.248 inch", Mount="Through Hole", PackageDescription="2-Pin Through Hole Device, Body 11.35 x 4.65 mm", PackageReference=FOXSLF160-20, Packaging=Bulk, RoHSCompliant=true

## Via types
v1: diameter 0.5, hole 0.3, Top Layer to Bottom Layer, 88 vias
v2: diameter 4, hole 2.5, Top Layer to Bottom Layer, 3 vias
v3: diameter 0.7, hole 0.4, Top Layer to Bottom Layer, 1 vias

## Nets (pads, with @x,y where several pads share a name; then routed paths per layer and width w, separated by ;. In a path a pad name is that pad's centre, name@x,y a point inside that pad or via, vN(x,y) a via of type N, cw(c..) or ccw(c..) an arc to the next point about the centre after c; other vN are vias at no path point)
3V3_IN: C4.2 C5.2 P1.3 R1.2 R6.1 TP3.1 U2.2 U3.5 | length 62.3
  Top Layer w0.254: U3.5 13.65,9.675 C5.2
  Top Layer w0.3: 14.775,9.85 14.85,9.925 TP3.1
  Top Layer w0.5: C5.2 14.775,9.85 16.25,8.375 v1(19.2,8.375) ; P1.3 49.49,9.235 53.25,12.995 53.25,15.175 v1(51.5,16.925) 52.25,17.675 v1(54.85,17.675)
  Bottom Layer w0.254: U2.2 v1(51.5,16.925)
  Bottom Layer w0.5: v1(19.2,8.375) 35.756,8.375 37.1,9.719 37.1,9.769 37.225,9.894 46.456,9.894 49.49,6.86 P1.3
5V: C10.2 R3.1 R10.1 R18.2 TP4.1 U4.1 | length 36.7
  Bottom Layer w0.3: v1(16.4,10.975) 16.9,10.475 16.9,10.375
  Bottom Layer w0.5: R10.1 16.9,10.375 19.85,13.325 22.575,13.325 25.85,16.6 ; R18.2 24.275,25.575 23.725,25.575 23.25,25.1 23.25,23.625 24.062,22.812 C10.2@26.338,22.812 ; v3(26.363,22.812) C10.2@26.338,22.812 ; R3.1 33.015,16.6 25.85,16.6 ; 25.85,16.6 25.85,22.032 25.85,22.325 C10.2@26.338,22.812
CAN_INH: R22.2 U3.7 | length 33.8
  Top Layer w0.254: U3.7 12.448,10.675 13.172,11.4 15.325,11.4 17.7,13.775 17.7,17.279 19.492,19.071 24.346,19.071 26.125,20.85 32.3,20.85 33.85,22.4 37.775,22.4 38.6,23.225 R22.2
CAN_MISO: P2.1 U1.15 U3.6 | length 52
  Top Layer w0.3: v1(11,10.175) U3.6 ; U1.15 37.296,15.025 38.95,15.025 40.15,13.825 40.15,6.755 P2.1
  Bottom Layer w0.3: v1(11,10.175) 10.962,10.137 10.479,10.137 10.478,10.136 10.022,10.136 9.7,10.458 9.7,11.324 9.876,11.5 11.6,11.5 12.375,10.725 12.375,10.1 12.377,10.098 12.377,8.248 13.171,7.454 13.979,7.454 13.981,7.452 39.453,7.452 P2.1
CAN_MOSI: P2.3 U1.14 U3.11 | length 44
  Top Layer w0.3: U3.11 v1(10.25,9.175) ; U1.14 38.816,13.734 39.525,13.025 39.525,7.275 39.095,6.845 P2.3
  Bottom Layer w0.3: v1(10.25,9.175) 10.25,9.121 12.773,6.598 34.627,6.598 35.275,5.95 35.275,4.65 35.925,4 37.825,4 P2.3
CAN_N: C7.1 D4.2 J1.1 J2.1 L1.4 R15.1 R16.1 | length 78.7
  Top Layer w0.3: L1.4 9.4,13.825 R15.1 10.625,13.65 12.785,13.65 14.49,15.355 C7.1@14.49,15.59 ; C7.1 14.49,15.81 14.49,16.172 14.119,16.542 14.119,16.791 14.42,17.092 14.42,18.584 11.375,21.629 11.375,23.825 12.425,24.875 15.841,24.875 16.236,24.479 16.236,23.226 16.061,23.05 J1.1 15.475,21.925 D4.2
  Bottom Layer w0.3: J1.1 13.9,23.5 R16.1 11.525,23.875 11.525,23.961 10.924,24.562 10.098,25.388 10.098,31.222 13.526,34.65 41.435,34.65 43.763,32.321 43.763,31.626 43.939,31.45 J2.1
CAN_nCS: P1.5 U1.16 | length 19.3
  Top Layer w0.3: U1.16 39.176,16.274 40.8,14.65 40.8,7.6 41.3,7.1 46.7,7.1 46.95,6.85 P1.5
CAN_nINT: P2.7 R6.2 U1.12 | length 8
  Top Layer w0.3: P2.7 34.015,9.134 36.075,11.194 v1(37.275,11.194)
CAN_P: C13.2 D4.1 J1.4 J2.4 L1.1 R16.2 R17.2 | length 79.8
  Top Layer w0.3: L1.1 8.735,16.95 9.361,17.576 R17.2 10.624,17.75 C13.2 13.063,17.487 13.175,17.487 13.569,17.093 13.818,17.093 13.993,17.268 13.993,18.407 11.975,20.425 10.948,21.452 10.948,24.002 12.248,25.302 16.018,25.302 16.663,24.656 16.663,23.226 16.839,23.05 J1.4 16.775,21.275 D4.1
  Bottom Layer w0.3: J1.4 16.4,25.2 R16.2 11.689,24.989 11.101,24.989 10.525,25.565 10.525,31.045 13.703,34.223 41.258,34.223 43.336,32.144 43.336,31.626 43.161,31.45 J2.4
CAN_RX: R8.1 U1.2 U3.4 | length 51
  Top Layer w0.3: U3.4 14.35,9.175 16.85,6.675 28.55,6.675 29.575,7.7 29.575,16.925 28.971,17.529 27.89,17.529 v1(27.875,17.544)
  Bottom Layer w0.3: v1(27.875,17.544) 29.829,19.498 44.673,19.498 46.522,17.649 47.151,17.649 R8.1
CAN_SCLK: P2.5 U1.13 U3.8 | length 42
  Top Layer w0.3: U3.8 9.027,10.678 9.949,10.678 10.221,10.95 v1(10.275,10.95) ; P2.5 36.555,6.855 36.8,7.1 38.475,7.1 38.9,7.525 38.9,12.075 38.511,12.464 U1.13
  Bottom Layer w0.3: v1(10.275,10.95) 11.45,10.95 11.948,10.452 11.948,9.923 11.95,9.921 11.95,8.775 11.95,8.025 12.948,7.027 13.802,7.027 13.804,7.025 34.804,7.025 36.555,5.274 P2.5
CAN_TX: R11.2 U1.1 U3.1 | length 52.3
  Top Layer w0.3: U3.1 12.113,7.672 12.653,7.672 14.1,6.225 28.775,6.225 30.1,7.55 30.1,17.85 29.136,18.814 v1(27.875,18.814)
  Bottom Layer w0.3: v1(27.875,18.814) 28.986,19.925 44.85,19.925 45.9,18.875 R11.2
CAN_VSUP: D3.2 F1.1 J1.5 J1.6 | length 12
  Top Layer w0.3: J1.5 20.725,27.25 22.2,25.775 D3.2
  Top Layer w2: J1.5 J1.6 F1.1
EXT_5V: P1.1 R4.1 R12.1 | length 51.5
  Bottom Layer w0.5: R12.1 18.325,8.5 18.85,9.025 33.5,9.025 36.64,12.165 37.985,12.165 39.629,10.521 46.779,10.521 ; v1(40.125,18.8) 46.779,12.146 46.779,10.521 ; P1.1 46.779,10.521
GND: C1.1 C2.1 C3.1 C4.1 C5.1 C6.1 C7.2 C8.1 C9.2 C10.1 C11.1 C12.1 C13.1 D1.1 D1.4 D2.1 D2.4 D4.3 D5.1 J1.2 J1.3 J2.2 J2.3 P1.2 P1.4 P1.6 P1.8 P2.2 P2.4 P2.6 P2.8 Q4.1 R19.2 R23.2 SW1.1 TP6.1 TP7.1 TP8.1 U1.9 U2.1 U2.11 U2.12 U2.13 U2.16 U3.2 U4.2
  other v1: 6.5,5.325 9.5,5.325 13.2,5.55 13.762,5.55 14.325,5.55 2,8.325 44,8.325 47,8.325 53,8.325 33.5,11.325 42.5,11.325 54.5,11.325 51.725,14.075 2,14.325 26,14.325 32,14.325 35,14.325 12.8,15.7 13.8,15.7 49.45,16.55 50.7,16.925 12.8,16.95 6.5,17.325 21.5,17.325 24.5,17.325 39.5,17.325 16.125,18.075 2,20.325 5,20.325 8,20.325 11,20.325 14,20.325 20,20.325 56,20.325 3.5,23.325 9.5,23.325 21.5,23.325 48.5,23.325 57.5,23.325 2,26.325 5,26.325 8,26.325 26,26.325 29,26.325 50,26.325 53,26.325 56,26.325 3.5,29.325 6.5,29.325 9.5,29.325 12.5,29.325 15.5,29.325 33.5,29.325 48.5,29.325 51.5,29.325 54.5,29.325 57.5,29.325 2,32.325 5,32.325 32,32.325 50,32.325 56,32.325
  other v2: 3,3 57,3 36,31.946
INT_VCC: C12.2 D6.1 Q1.1 Q1.2 Q1.3 Q3.5-6-7-8 R20.2 U4.3 | length 9.2
  Top Layer w0.5: U4.3 29.375,23.035 29.415,23.075 v1(31.6,23.075) 31.6,25.887 32.582,26.869 Q3.5-6-7-8
  Bottom Layer w0.3: v1(31.6,23.075) 32.825,24.3 33.025,24.3 R20.2
NetC1_2: C1.2 U1.8 Y1.2 | length 9.5
  Top Layer w0.3: Y1.2 23.536,9.924 U1.8
  Top Layer w0.5: C1.2 18.994,10.615 19.25,10.871 19.529,10.871 19.543,10.885 Y1.2
NetC2_2: C2.2 U1.7 Y1.1 | length 12.6
  Top Layer w0.3: Y1.1 22.575,13.05 24.431,11.194 U1.7
  Top Layer w0.5: C2.2@18.789,15.925 22.415,15.925 Y1.1
NetC3_2: C3.2 R10.2 R12.2 U3.3 | length 4
  Top Layer w0.254: U3.3 13.65,8.675 v1(13.825,8.5) C3.2@13.837,8.512
  Bottom Layer w0.5: v1(13.825,8.5) R12.2 R10.2
NetC6_2: C6.2 D3.1 R13.1 U3.10 | length 26.1
  Top Layer w0.254: v1(7.225,9.65) 7.238,9.663 9.012,9.663 U3.10
  Top Layer w0.3: v1(14.125,12) 15.15,12 17.275,14.125 17.275,17.425 19.325,19.475 20.723,19.475 22.2,20.952 D3.1
  Bottom Layer w0.254: v1(7.225,9.65) 6.35,10.525 6.35,11.65 6.7,12 v1(14.125,12)
NetC8_2: C8.2 R13.2 R14.2 SW1.2 | length 60.6
  Top Layer w0.254: R14.2 5.987,10.937 7.212,10.937 v1(7.225,10.95)
  Bottom Layer w0.3: v1(7.225,10.95) 7.335,11.06 7.335,11.42 7.511,11.596 8.854,11.596 9.203,11.247 9.203,9.397 12.45,6.15 28.05,6.15 32.8,1.4 53.25,1.4 54.025,2.175 54.025,4.4 v1(57,7.375)
NetC9_1: C9.1 R15.2 R17.1
NetC11_2: C11.2 R3.2 R4.2 R5.1 U1.18 | length 5.5
  Top Layer w0.5: C11.2 37.425,20.725 37.425,18.86 37.379,18.814 v1(37.275,18.814) 37.282,18.807 39.218,18.807 R4.2
  Bottom Layer w0.5: R3.2 36.198,18.837 37.252,18.837 v1(37.275,18.814)
NetD1_2: D1.2 R1.1
  other v1: 56.2,17.475
NetD1_3: D1.3 R2.2
  other v1: 56.2,16.55
NetD2_2: D2.2 R7.1
  other v1: 56.2,14.45
NetD2_3: D2.3 R9.1
  other v1: 56.2,13.55
NetD5_2: D5.2 R18.1
  other v1: 24.375,24.425
NetF1_2: F1.2 Q1.5-6-7-8
NetQ2_1: Q2.1 Q2.2 Q2.3 Q3.1 Q3.2 Q3.3
NetQ4_2: Q4.2 R22.1 R23.1 | length 2.2
  Top Layer w0.254: Q4.2 36.768,24.093 37.481,24.093 37.864,24.475 v1(38.675,24.475)
NetQ4_6: Q4.6 R20.1 R21.2 | length 1.6
  Top Layer w0.254: v1(33.25,23.225) 33.327,23.302 34.727,23.302 Q4.6
NetR5_2: R5.2 U1.17
  other v1: 37.275,17.544
NetR7_2: R7.2 U2.5 U2.6 | length 2.2
  Bottom Layer w0.254: U2.6 U2.5 54.775,14.75 R7.2
NetR8_2: R8.2 U2.4 | length 5.8
  Bottom Layer w0.254: R8.2 51.875,17.625 52.5,17 U2.4
NetR9_2: R9.2 U2.7 U2.8 | length 2.2
  Bottom Layer w0.254: U2.7 U2.8 54.775,13.25 R9.2
NetR11_1: R11.1 U2.9 | length 12
  Bottom Layer w0.254: R11.1 48.475,18.825 48.227,18.577 48.177,18.577 47.825,18.225 47.825,16.987 49,15.812 49,12.1 49.5,11.6 52.175,11.6 52.5,11.925 U2.9
NetR14_1: R14.1 U3.9 | length 3.3
  Top Layer w0.254: R14.1 6.05,9.675 6.654,10.279 8.096,10.279 8.2,10.175 U3.9
PMOS_SIG: Q2.4 Q3.4 R21.1 | length 7.1
  Top Layer w0.254: R21.1 33.325,24.475 33.548,24.698 33.846,24.996 ; Q3.4 34.302,28.177 34.02,28.177 33.846,28.003 33.846,24.996 ; Q2.4 35.975,26.275 35.1,25.4 34.25,25.4 33.846,24.996
PN_nCS: P1.7 U3.14 | length 37.4
  Top Layer w0.3: U3.14 9.95,7.675 12.725,4.9 30.825,4.9 31.725,4 43.14,4 P1.7
PRE_CAN_N: L1.3 U3.12 | length 10.5
  Top Layer w0.3: L1.3 4.55,14.437 4.4,14.287 4.323,14.287 4.1,14.064 4.1,9.725 5.187,8.638 8.652,8.638 8.688,8.675 U3.12
PRE_CAN_P: L1.2 U3.13 | length 13.7
  Top Layer w0.3: L1.2 4.55,16.763 4.307,16.52 4.307,16.457 3.673,15.823 3.673,9.548 5.01,8.211 8.652,8.211 8.688,8.175 U3.13
PWR_OUT: J2.5 J2.6 Q2.5-6-7-8 R2.1 | length 26.8
  Top Layer w2: Q2.5-6-7-8 37.836,27.269 41.431,27.269 J2.5 J2.6
  Bottom Layer w0.254: J2.6 43.75,20.75 54.375,20.75 55.504,19.621 55.504,17.004 54.95,16.45 R2.1
RP_MOS_LINK: D6.2 Q1.4 R19.1 | length 12.9
  Top Layer w0.3: R19.1 25.175,28.75 25.175,29.4 24.8,29.775 24.8,33.15 25.275,33.625 29.75,33.625 30.65,32.725 Q1.4
  Top Layer w0.5: R19.1 D6.2
pads on no net: J1. J2. Q4.3 Q4.4 Q4.5 U1.3 U1.4 U1.5 U1.6 U1.10 U1.11 U2.3 U2.10 U2.14 U2.15

## Polygon pours and split planes (outlines as drawn)
GND on Top Layer "GND_L01_P005" (solid, remove dead copper, pour order 5): 0,3 ccw(c3,3) 3,0 57,0 ccw(c57,3) 60,3 60,32 ccw(c57,32) 57,35 3,35 ccw(c3,32) 0,32
NetC9_1 on Top Layer "NETC9_1_L01_P004" (solid, pour order 4): 10.019,16.652 10.019,14.748 10.881,14.748 12.26,15.44 12.26,15.96 10.881,16.652
NetQ2_1 on Top Layer "NETQ2_1_L01_P003" (solid, pour order 3): 34.1,27.75 34.6,27.75 35.8,28.4 36.3,28.4 36.3,26.75 35.8,26.75 34.6,26.1 34.1,26.1
INT_VCC on Top Layer "INT_VCC_L01_P002" (solid, pour order 2): 30.4,31.95 30.4,30.3 29.452,29.135 29.452,27.926 31.302,26.077 31.6,26.025 33.58,26.025 33.58,28.475 30.9,31.95
NetF1_2 on Top Layer "NETF1_2_L01_P000" (solid, pour order 0): 25.155,33.025 27.115,33.025 29.88,32.675 29.88,30.225 27.115,29.875 25.155,29.875
GND on Bottom Layer "GND_L02_P006" (solid, remove dead copper, pour order 6): 0,3 ccw(c3,3) 3,0 57,0 ccw(c57,3) 60,3 60,32 ccw(c57,32) 57,35 3,35 ccw(c3,32) 0,32

## Silkscreen, mask and mechanical layers (free items; w line width, h text height)
Top Overlay:
  drawing of 17 lines, arcs and shapes, not listed
  text "JLCJLCJLCJLC" at 0.7,27.275 h1
  text "U1" at 26.9,20.4 h0.75
  text "PWR" at 56.138,18.15 h0.75
  text "CAN" at 56.138,15.15 h0.75
  text "U3" at 9.325,11.9 h0.75
  text "WAKE" at 55.625,11.65 h0.75
  text "CANSwitch V2" at 6.9,2 h2
Bottom Overlay:
  text "INT" at 34.952,6.625 h0.75
  text "CLK" at 37.555,6.625 h0.75
  text "SDI" at 39.97,6.625 h0.75
  text "SDO" at 42.635,6.625 h0.75
  text "CS1" at 45.285,6.625 h0.75
  text "CS3" at 47.95,6.625 h0.75
  text "5V" at 50.115,6.625 h0.75
  text "3V3" at 53.03,6.625 h0.75
  text "GND" at 35.015,0.825 h0.75
  text "GND" at 37.555,0.825 h0.75
  text "GND" at 40.095,0.825 h0.75
  text "GND" at 42.635,0.825 h0.75
  text "GND" at 45.41,0.825 h0.75
  text "GND" at 47.95,0.825 h0.75
  text "GND" at 50.49,0.825 h0.75
  text "GND" at 53.03,0.825 h0.75
Mechanical 1:
  the board outline again, w0.254

## Text inside footprints (layer, text, board x,y; h text height)
U3: Top 3D Body "*" at 11.559,8.375 h1.27 r180; Top Overlay "*" at 12.683,7.497 h1.27 r180